# EAGLE board msop8 (EAGLE 5.06)
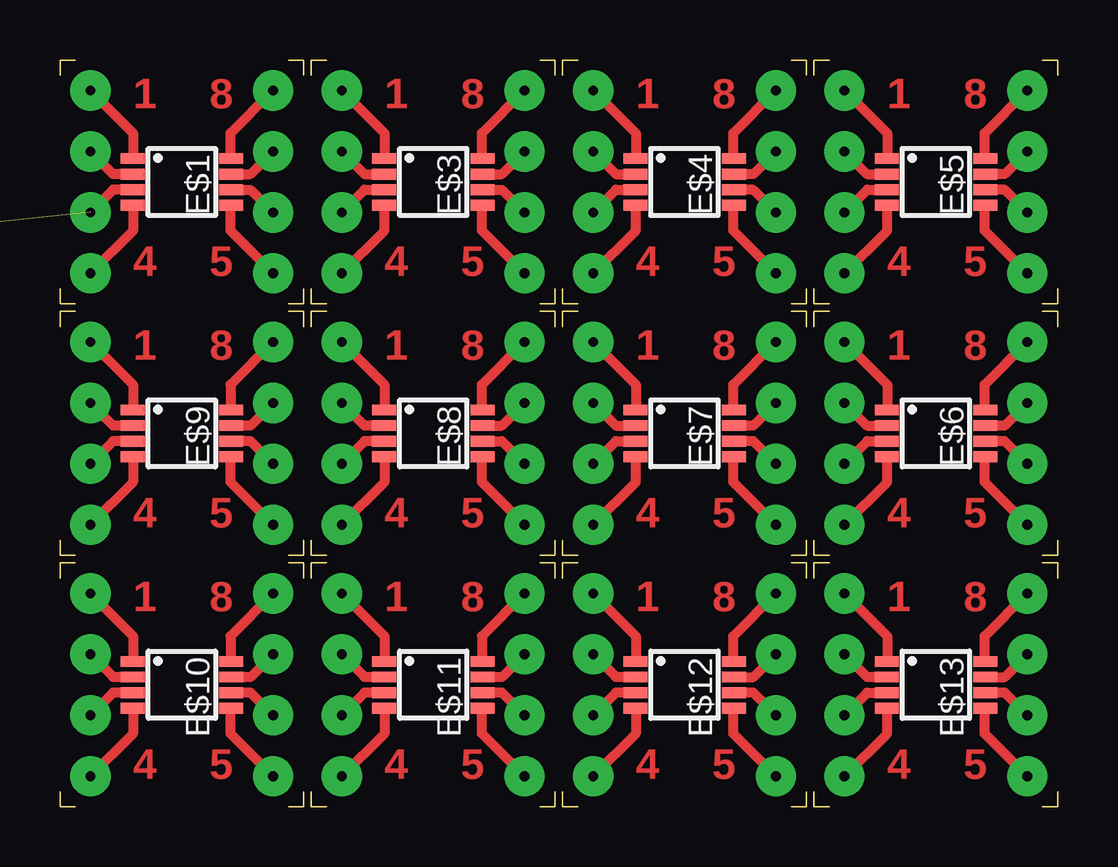
[diagram p0: board, top side]

Size 41.59 x 31.12 mm. Coordinates in mm from the lower left corner, seen from the top.
Outline: 0.63,31.12 0,31.12 0,30.48
Outline: 9.53,31.12 10.16,31.12 10.16,30.48
Outline: 9.53,20.95 10.16,20.95 10.16,21.59
Outline: 0,21.59 0,20.95 0.63,20.95
Outline: 11.11,31.12 10.48,31.12 10.48,30.48
Outline: 20,31.12 20.64,31.12 20.64,30.48
Outline: 20,20.95 20.64,20.95 20.64,21.59
Outline: 10.48,21.59 10.48,20.95 11.11,20.95
Outline: 21.59,31.12 20.95,31.12 20.95,30.48
Outline: 30.48,31.12 31.12,31.12 31.12,30.48
Outline: 30.48,20.95 31.12,20.95 31.12,21.59
Outline: 20.95,21.59 20.95,20.95 21.59,20.95
Outline: 32.07,31.12 31.43,31.12 31.43,30.48
Outline: 40.96,31.12 41.59,31.12 41.59,30.48
Outline: 40.96,20.95 41.59,20.95 41.59,21.59
Outline: 31.43,21.59 31.43,20.95 32.07,20.95
Outline: 0.63,20.64 0,20.64 0,20
Outline: 9.53,20.64 10.16,20.64 10.16,20
Outline: 9.53,10.48 10.16,10.48 10.16,11.11
Outline: 0,11.11 0,10.48 0.63,10.48
Outline: 11.11,20.64 10.48,20.64 10.48,20
Outline: 20,20.64 20.64,20.64 20.64,20
Outline: 20,10.48 20.64,10.48 20.64,11.11
Outline: 10.48,11.11 10.48,10.48 11.11,10.48
Outline: 21.59,20.64 20.95,20.64 20.95,20
Outline: 30.48,20.64 31.12,20.64 31.12,20
Outline: 30.48,10.48 31.12,10.48 31.12,11.11
Outline: 20.95,11.11 20.95,10.48 21.59,10.48
Outline: 32.07,20.64 31.43,20.64 31.43,20
Outline: 40.96,20.64 41.59,20.64 41.59,20
Outline: 40.96,10.48 41.59,10.48 41.59,11.11
Outline: 31.43,11.11 31.43,10.48 32.07,10.48
Outline: 0.63,10.16 0,10.16 0,9.52
Outline: 9.53,10.16 10.16,10.16 10.16,9.52
Outline: 9.53,0 10.16,0 10.16,0.64
Outline: 0,0.64 0,0 0.63,0
Outline: 11.11,10.16 10.48,10.16 10.48,9.52
Outline: 20,10.16 20.64,10.16 20.64,9.52
Outline: 20,0 20.64,0 20.64,0.64
Outline: 10.48,0.64 10.48,0 11.11,0
Outline: 21.59,10.16 20.95,10.16 20.95,9.52
Outline: 30.48,10.16 31.12,10.16 31.12,9.52
Outline: 30.48,0 31.12,0 31.12,0.64
Outline: 20.95,0.64 20.95,0 21.59,0
Outline: 32.07,10.16 31.43,10.16 31.43,9.52
Outline: 40.96,10.16 41.59,10.16 41.59,9.52
Outline: 40.96,0 41.59,0 41.59,0.64
Outline: 31.43,0.64 31.43,0 32.07,0
Copper layers (1*16): Top 0.035mm / dielectric 1.5mm / Bottom 0.035mm
Design rules "default": minimum track width 10mil, minimum drill 24mil, track to track 8mil, track to pad 8mil, pad to pad 8mil, via to via 8mil, smd to smd 8mil, copper to edge 40mil, drill to drill 8mil, minimum pad ring 10mil, minimum via ring 8mil, stop-mask expansion 4mil, vias tented up to drill 0mil, thermal gap 10mil

## Footprints (pad centres in the part's own frame; a part is rotated, then mirrored left to right if it is on the bottom)
MSOP8 = smd 0.45 x 1: 1 -0.975,-2.05; 2 -0.325,-2.05; 3 0.325,-2.05; 4 0.975,-2.05; 5 0.975,2.05; 6 0.325,2.05; 7 -0.325,2.05; 8 -0.975,2.05

## Placement (x,y rotation side)
E$1  [MSOP8]  5.08,26.04 270 top
E$3  [MSOP8]  15.56,26.04 270 top
E$4  [MSOP8]  26.03,26.04 270 top
E$5  [MSOP8]  36.51,26.04 270 top
E$6  [MSOP8]  36.51,15.56 270 top
E$7  [MSOP8]  26.03,15.56 270 top
E$8  [MSOP8]  15.56,15.56 270 top
E$9  [MSOP8]  5.08,15.56 270 top
E$10  [MSOP8]  5.08,5.08 270 top
E$11  [MSOP8]  15.56,5.08 270 top
E$12  [MSOP8]  26.03,5.08 270 top
E$13  [MSOP8]  36.51,5.08 270 top

## Library data of the parts
E$1 E$3-E$13 = ref-packages

## Tracks (layer width: path | path; a pad name or v marks a point on that pad's centre or on a via)
S$1  (via drill 0.41 pad 1.68)
  Top 0.406: v11.75,27.3 12.69,26.36 13.54,26.36
S$2  (via drill 0.41 pad 1.68)  (1 unrouted)
  Top 0.406: v1.27,24.77 2.21,25.71 3.13,25.71
S$3  (via drill 0.41 pad 1.68)
  Top 0.406: v8.89,29.84 7.11,28.07 7.11,27.05
S$4  (via drill 0.41 pad 1.68)
  Top 0.406: v8.89,27.3 7.95,26.36 7.08,26.36
S$5  (via drill 0.41 pad 1.68)
  Top 0.406: v1.27,22.23 3.05,24 3.05,25.02
S$6  (via drill 0.41 pad 1.68)
  Top 0.406: v8.89,24.77 7.95,25.71 7.08,25.71
S$7  (via drill 0.41 pad 1.68)
  Top 0.406: v1.27,27.3 2.21,26.36 3.06,26.36
S$8  (via drill 0.41 pad 1.68)
  Top 0.406: 7.11,25.02 7.11,24 v8.89,22.23
S$9  (via drill 0.41 pad 1.68)
  Top 0.406: v1.27,29.84 3.05,28.07 3.05,27.05
S$10  (via drill 0.41 pad 1.68)
  Top 0.406: v11.75,29.84 13.53,28.07 13.53,27.05
S$11  (via drill 0.41 pad 1.68)
  Top 0.406: v11.75,22.23 13.53,24 13.53,25.02
S$12  (via drill 0.41 pad 1.68)
  Top 0.406: v11.75,24.77 12.69,25.71 13.61,25.71
S$13  (via drill 0.41 pad 1.68)
  Top 0.406: v19.37,29.84 17.59,28.07 17.59,27.05
S$14  (via drill 0.41 pad 1.68)
  Top 0.406: v19.37,27.3 18.42,26.36 17.56,26.36
S$15  (via drill 0.41 pad 1.68)
  Top 0.406: 17.59,25.02 17.59,24 v19.37,22.23
S$16  (via drill 0.41 pad 1.68)
  Top 0.406: v19.37,24.77 18.43,25.71 17.56,25.71
S$17  (via drill 0.41 pad 1.68)
  Top 0.406: v22.23,27.3 23.17,26.36 24.02,26.36
S$18  (via drill 0.41 pad 1.68)
  Top 0.406: v22.23,29.84 24,28.07 24,27.05
S$19  (via drill 0.41 pad 1.68)
  Top 0.406: v22.23,22.23 24,24 24,25.02
S$20  (via drill 0.41 pad 1.68)
  Top 0.406: v22.23,24.77 23.17,25.71 24.09,25.71
S$21  (via drill 0.41 pad 1.68)
  Top 0.406: v29.84,29.84 28.07,28.07 28.07,27.05
S$22  (via drill 0.41 pad 1.68)
  Top 0.406: v29.84,27.3 28.9,26.36 28.04,26.36
S$23  (via drill 0.41 pad 1.68)
  Top 0.406: 28.07,25.02 28.07,24 v29.84,22.23
S$24  (via drill 0.41 pad 1.68)
  Top 0.406: v29.84,24.77 28.9,25.71 28.04,25.71
S$25  (via drill 0.41 pad 1.68)
  Top 0.406: v32.7,27.3 33.65,26.36 34.49,26.36
S$26  (via drill 0.41 pad 1.68)
  Top 0.406: v32.7,29.84 34.48,28.07 34.48,27.05
S$27  (via drill 0.41 pad 1.68)
  Top 0.406: v32.7,22.23 34.48,24 34.48,25.02
S$28  (via drill 0.41 pad 1.68)
  Top 0.406: v32.7,24.77 33.65,25.71 34.56,25.71
S$29  (via drill 0.41 pad 1.68)
  Top 0.406: v40.32,29.84 38.55,28.07 38.55,27.05
S$30  (via drill 0.41 pad 1.68)
  Top 0.406: v40.32,27.3 39.38,26.36 38.52,26.36
S$31  (via drill 0.41 pad 1.68)
  Top 0.406: 38.55,25.02 38.55,24 v40.32,22.23
S$32  (via drill 0.41 pad 1.68)
  Top 0.406: v40.32,24.77 39.38,25.71 38.52,25.71
S$33  (via drill 0.41 pad 1.68)
  Top 0.406: v1.27,16.83 2.21,15.88 3.06,15.88
S$34  (via drill 0.41 pad 1.68)
  Top 0.406: v1.27,19.37 3.05,17.59 3.05,16.57
S$35  (via drill 0.41 pad 1.68)
  Top 0.406: v1.27,11.75 3.05,13.53 3.05,14.54
S$36  (via drill 0.41 pad 1.68)
  Top 0.406: v1.27,14.29 2.21,15.23 3.13,15.23
S$37  (via drill 0.41 pad 1.68)
  Top 0.406: v8.89,19.37 7.11,17.59 7.11,16.57
S$38  (via drill 0.41 pad 1.68)
  Top 0.406: v8.89,16.83 7.95,15.88 7.08,15.88
S$39  (via drill 0.41 pad 1.68)
  Top 0.406: 7.11,14.54 7.11,13.53 v8.89,11.75
S$40  (via drill 0.41 pad 1.68)
  Top 0.406: v8.89,14.29 7.95,15.23 7.08,15.23
S$41  (via drill 0.41 pad 1.68)
  Top 0.406: v11.75,16.83 12.69,15.88 13.54,15.88
S$42  (via drill 0.41 pad 1.68)
  Top 0.406: v11.75,19.37 13.53,17.59 13.53,16.57
S$43  (via drill 0.41 pad 1.68)
  Top 0.406: v11.75,11.75 13.53,13.53 13.53,14.54
S$44  (via drill 0.41 pad 1.68)
  Top 0.406: v11.75,14.29 12.69,15.23 13.61,15.23
S$45  (via drill 0.41 pad 1.68)
  Top 0.406: v19.37,19.37 17.59,17.59 17.59,16.57
S$46  (via drill 0.41 pad 1.68)
  Top 0.406: v19.37,16.83 18.42,15.88 17.56,15.88
S$47  (via drill 0.41 pad 1.68)
  Top 0.406: 17.59,14.54 17.59,13.53 v19.37,11.75
S$48  (via drill 0.41 pad 1.68)
  Top 0.406: v19.37,14.29 18.43,15.23 17.56,15.23
S$49  (via drill 0.41 pad 1.68)
  Top 0.406: v22.23,16.83 23.17,15.88 24.02,15.88
S$50  (via drill 0.41 pad 1.68)
  Top 0.406: v22.23,19.37 24,17.59 24,16.57
S$51  (via drill 0.41 pad 1.68)
  Top 0.406: v22.23,11.75 24,13.53 24,14.54
S$52  (via drill 0.41 pad 1.68)
  Top 0.406: v22.23,14.29 23.17,15.23 24.09,15.23
S$53  (via drill 0.41 pad 1.68)
  Top 0.406: v29.84,19.37 28.07,17.59 28.07,16.57
S$54  (via drill 0.41 pad 1.68)
  Top 0.406: v29.84,16.83 28.9,15.88 28.04,15.88
S$55  (via drill 0.41 pad 1.68)
  Top 0.406: 28.07,14.54 28.07,13.53 v29.84,11.75
S$56  (via drill 0.41 pad 1.68)
  Top 0.406: v29.84,14.29 28.9,15.23 28.04,15.23
S$57  (via drill 0.41 pad 1.68)
  Top 0.406: v32.7,16.83 33.65,15.88 34.49,15.88
S$58  (via drill 0.41 pad 1.68)
  Top 0.406: v32.7,19.37 34.48,17.59 34.48,16.57
S$59  (via drill 0.41 pad 1.68)
  Top 0.406: v32.7,11.75 34.48,13.53 34.48,14.54
S$60  (via drill 0.41 pad 1.68)
  Top 0.406: v32.7,14.29 33.65,15.23 34.56,15.23
S$61  (via drill 0.41 pad 1.68)
  Top 0.406: v40.32,19.37 38.55,17.59 38.55,16.57
S$62  (via drill 0.41 pad 1.68)
  Top 0.406: v40.32,16.83 39.38,15.88 38.52,15.88
S$63  (via drill 0.41 pad 1.68)
  Top 0.406: 38.55,14.54 38.55,13.53 v40.32,11.75
S$64  (via drill 0.41 pad 1.68)
  Top 0.406: v40.32,14.29 39.38,15.23 38.52,15.23
S$65  (via drill 0.41 pad 1.68)
  Top 0.406: v1.27,6.35 2.21,5.41 3.06,5.41
S$66  (via drill 0.41 pad 1.68)
  Top 0.406: v1.27,8.89 3.05,7.11 3.05,6.1
S$67  (via drill 0.41 pad 1.68)
  Top 0.406: v1.27,1.27 3.05,3.05 3.05,4.06
S$68  (via drill 0.41 pad 1.68)
  Top 0.406: v1.27,3.81 2.21,4.75 3.13,4.75
S$69  (via drill 0.41 pad 1.68)
  Top 0.406: v8.89,8.89 7.11,7.11 7.11,6.1
S$70  (via drill 0.41 pad 1.68)
  Top 0.406: v8.89,6.35 7.95,5.41 7.08,5.41
S$71  (via drill 0.41 pad 1.68)
  Top 0.406: 7.11,4.06 7.11,3.05 v8.89,1.27
S$72  (via drill 0.41 pad 1.68)
  Top 0.406: v8.89,3.81 7.95,4.75 7.08,4.75
S$73  (via drill 0.41 pad 1.68)
  Top 0.406: v11.75,6.35 12.69,5.41 13.54,5.41
S$74  (via drill 0.41 pad 1.68)
  Top 0.406: v11.75,8.89 13.53,7.11 13.53,6.1
S$75  (via drill 0.41 pad 1.68)
  Top 0.406: v11.75,1.27 13.53,3.05 13.53,4.06
S$76  (via drill 0.41 pad 1.68)
  Top 0.406: v11.75,3.81 12.69,4.75 13.61,4.75
S$77  (via drill 0.41 pad 1.68)
  Top 0.406: v19.37,8.89 17.59,7.11 17.59,6.1
S$78  (via drill 0.41 pad 1.68)
  Top 0.406: v19.37,6.35 18.42,5.41 17.56,5.41
S$79  (via drill 0.41 pad 1.68)
  Top 0.406: 17.59,4.06 17.59,3.05 v19.37,1.27
S$80  (via drill 0.41 pad 1.68)
  Top 0.406: v19.37,3.81 18.43,4.75 17.56,4.75
S$81  (via drill 0.41 pad 1.68)
  Top 0.406: v22.23,6.35 23.17,5.41 24.02,5.41
S$82  (via drill 0.41 pad 1.68)
  Top 0.406: v22.23,8.89 24,7.11 24,6.1
S$83  (via drill 0.41 pad 1.68)
  Top 0.406: v22.23,1.27 24,3.05 24,4.06
S$84  (via drill 0.41 pad 1.68)
  Top 0.406: v22.23,3.81 23.17,4.75 24.09,4.75
S$85  (via drill 0.41 pad 1.68)
  Top 0.406: v29.84,8.89 28.07,7.11 28.07,6.1
S$86  (via drill 0.41 pad 1.68)
  Top 0.406: v29.84,6.35 28.9,5.41 28.04,5.41
S$87  (via drill 0.41 pad 1.68)
  Top 0.406: 28.07,4.06 28.07,3.05 v29.84,1.27
S$88  (via drill 0.41 pad 1.68)
  Top 0.406: v29.84,3.81 28.9,4.75 28.04,4.75
S$89  (via drill 0.41 pad 1.68)
  Top 0.406: v32.7,6.35 33.65,5.41 34.49,5.41
S$90  (via drill 0.41 pad 1.68)
  Top 0.406: v32.7,8.89 34.48,7.11 34.48,6.1
S$91  (via drill 0.41 pad 1.68)
  Top 0.406: v32.7,1.27 34.48,3.05 34.48,4.06
S$92  (via drill 0.41 pad 1.68)
  Top 0.406: v32.7,3.81 33.65,4.75 34.56,4.75
S$93  (via drill 0.41 pad 1.68)
  Top 0.406: v40.32,8.89 38.55,7.11 38.55,6.1
S$94  (via drill 0.41 pad 1.68)
  Top 0.406: v40.32,6.35 39.38,5.41 38.52,5.41
S$95  (via drill 0.41 pad 1.68)
  Top 0.406: 38.55,4.06 38.55,3.05 v40.32,1.27
S$96  (via drill 0.41 pad 1.68)
  Top 0.406: v40.32,3.81 39.38,4.75 38.52,4.75

## Text on the board
Top: 1 | 8 | 1 | 8 | 1 | 8 | 1 | 8 | 4 | 5 | 4 | 5 | 4 | 5 | 4 | 5 | 1 | 8 | 1 | 8 | 1 | 8 | 1 | 8 | 4 | 5 | 4 | 5 | 4 | 5 | 4 | 5 | 1 | 8 | 1 | 8 | 1 | 8 | 1 | 8 | 4 | 5 | 4 | 5 | 4 | 5 | 4 | 5